# Altium PCB AMS Board layout.PcbDoc
Units mm, origin at the board's own origin, x right, y up, seen from the top; angles counter-clockwise.
Board outline 13.59 x 6.35 mm, 2 copper layers (Top Layer, Bottom Layer), stack 0.121 mm thick; 11 components, 6 nets, 26 pads, 33 vias.
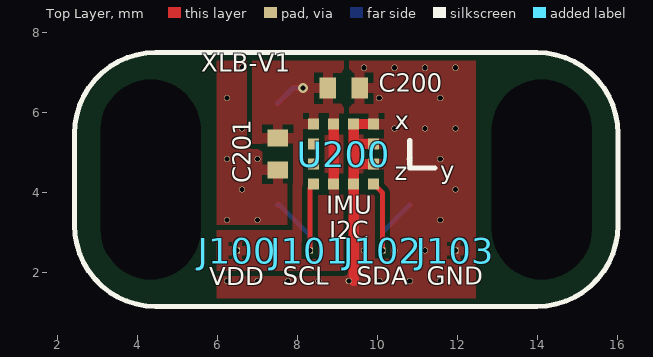
[diagram p0: Top Layer view]
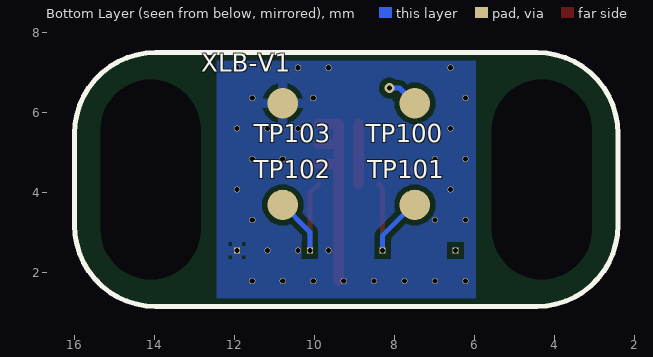
[diagram p1: Bottom Layer view, seen from below]

## Layer stack, top to bottom
Top Solder: solder mask 0.0254, SM-001, Dk 4
Top Layer: signal copper 0.035
Polyimide 4 Core: core 0.0508, Core-001, Dk 4.1
Bottom Layer: signal copper 0.035
Bottom Solder: solder mask 0.0254, SM-001, Dk 4

## Board outline
2.413,3.175 2.413,5.461 cw(c4.445,5.461) 4.445,7.493 13.97,7.493 cw(c13.97,5.461) 16.002,5.461 16.002,3.175 cw(c13.97,3.175) 13.97,1.143 4.445,1.143 cw(c4.445,3.175)

## Design rules (kind name [scope] priority, off if disabled: settings)
AcuteAngle [All] p1: minimum=6.00000000000000E+0001 checktracksonly=FALSE
AssemblyTestPointUsage [All] p1 off:
AssemblyTestpoint [All] p1 off: testpointundercomponent=TRUE minsize=1.016 maxsize=2.54 preferedsize=1.524 minholesize=0 maxholesize=1.016 preferedholesize=0.813 testpointgrid=0.025 usegrid=TRUE gridtolerance=0 allowsidetop=TRUE allowsidebottom=TRUE
BoardOutlineClearance [Not(OnLayer('Top Overlay')OR OnLayer('Bottom Overlay') or (IsPad and not InAnyNet))] p1: gap=0.06 ignorepadtopadclearanceinfootprint=FALSE except(0: Arc-SplitContinuation Track-SplitContinuation SMDPad-SplitContinuation THPad-SplitContinuation Via-SplitContinuation Fill-SplitContinuation Poly-SplitContinuation Region-SplitContinuation Text-SplitContinuation; 0.2: Poly-OutlineEdge Poly-CavityEdge Poly-CutoutEdge) // GSS_Standard
Clearance Clearance_GSS_STD_3mil_IMU [WithinRoom('U_IMU_MIS2DHTR')] p1: gap=0.127 ignorepadtopadclearanceinfootprint=TRUE // 18u (1/2oz) Cu
Clearance Clearance_GSS_STD_3mil [not WithinRoom('U_IMU_MIS2DHTR')] p2: gap=0.127 ignorepadtopadclearanceinfootprint=TRUE except(0.178: Arc-SMDPad Track-SMDPad)
ComponentClearance [All] p1: gap=0.2 collisioncheckmode=3 verticalgap=0.254 showdistances=FALSE
FabricationTestPointUsage [All] p1 off: valid=0 allowmultiple=FALSE
FabricationTestpoint [All] p1 off: side=3 testpointundercomponent=TRUE minsize=1.016 maxsize=2.54 preferedsize=1.524 minholesize=0 maxholesize=1.016 preferedholesize=0.813 testpointgrid=0.025 allowsidetop=TRUE allowsidebottom=TRUE usegrid=TRUE gridtolerance=0
FanoutControl Fanout_Default [All] p1: bgadir=Out bgaviamode=Centered fanoutstyle=Auto fanoutdirection=Alternating viagrid=0.025 // Fanout_Default (Default Rule)
HoleSize [All] p1: absolutevalues=TRUE maxlimit=6 minlimit=0.127 maxpercent=80.000 minpercent=20.000
HoleToHoleClearance [IsVia vs IsVia] p1: gap=0.254 allowstackedmicrovias=FALSE
MaxMinImpedance [InNet('NetC59_1')] p1: minimum=50.00 maximum=50.00
MinimumSolderMaskSliver MinimumSolderMaskSliver_GSS_PERF [All] p1: minsoldermaskwidth=0.018
NetAntennae [not (WithinRoom('ENPANEL') or WithinRoom('POWERIN') or WithinRoom('THERM'))] p1: netantennaetolerance=0
PermittedLayers [All] p1: toplayerpermitted=TRUE bottomlayerpermitted=TRUE
PlaneClearance [IsPolygon] p1 off: clearance=0.06
PlaneConnect [All] p1 off: planeconnectstyle=Direct reliefexpansion=0.508 reliefentries=4 reliefconductorwidth=0.254 reliefairgap=0.254
PolygonConnect [All] p1: thpad.connectstyle=Relief thpad.reliefconductorwidth=0.254 thpad.reliefentries=4 thpad.polygonreliefangle="90 Angle" thpad.airgapwidth=0.127 smdpad.connectstyle=Relief smdpad.reliefconductorwidth=0.254 smdpad.reliefentries=4 smdpad.polygonreliefangle="90 Angle" smdpad.airgapwidth=0.127 via.connectstyle=Direct via.reliefconductorwidth=0.254 via.reliefentries=4 via.polygonreliefangle="90 Angle" via.airgapwidth=0.127
RoomDefinition U_XLBoard [InComponentClass('U_XLBoard')] p1: confinementstyle=ConfineIn formatcopy=TRUE lockcomponents=FALSE outline 5.969,7.493 12.446,7.493 12.446,1.143 5.969,1.143
RoomDefinition U_IMU_MIS2DHTR [InComponentClass('U_IMU_MIS2DHTR')] p2: confinementstyle=ConfineIn formatcopy=TRUE lockcomponents=FALSE outline 6.858,3.048 11.43,3.048 11.43,7.239 6.858,7.239
RoutingCorners [All] p1 off: cornerstyle=45-Degree minsetback=2.54 maxsetback=2.54
RoutingVias [All] p1: holewidth=0.711 width=1.27 viastyle="Through Hole" minholewidth=0.127 minwidth=0.254 maxholewidth=0.711 maxwidth=1.27
SMDEntry [All] p1: side=TRUE corner=TRUE anyangle=TRUE
SMDNeckDown [All] p1 off: percent=50.000
SilkToSilkClearance [All] p1 off: silktosilkclearance=0.127
SilkToSolderMaskClearance SilkscreenOverComponentPads [All] p1: minsilkscreentomaskgap=0.127 clearancetoexposedcopper=FALSE
SolderMaskExpansion SolderMaskExpansion_Via [IsVia] p1: expansion=0.102 istentingtop=TRUE
UnConnectedPin [All] p1 off:
UnRoutedNet [All] p1: checkbadconnections=TRUE
Width Width_GSS_STD_10mil [All] p1: maxlimit=0.508 minlimit=0.076 preferedwidth=0.254 minimp=50.000000 maximp=50.000000 favimp=50.000000 // 18u (1/2oz) Cu
10 further rules are at their usual default settings.

## Classes and differential pairs
component class U_XLBoard: J100 J101 J102 J103 TP100 TP101 TP102 TP103
component class U_IMU_MIS2DHTR: C200 C201 U200

## Components (designator, comment, footprint, x,y, rotation, side; value= is the part's Value field where it differs from the comment)
C200 "ZRB15XR61A106ME01D" CAP0402_REDUCED 9.144,6.604 r180 top value=10uF
C201 "GCM155R71C104KA55" CAP0402_REDUCED 7.493,4.953 r90 top value=0.1uF
J100 "THPAD_20m" FEEDHOLE_20mil#1 7.696,2.54 r90 top value="FT pad"
J101 "THPAD_20m" FEEDHOLE_20mil#2 8.653,2.54 r90 top value="FT pad"
J102 "THPAD_20m" FEEDHOLE_20mil#3 9.635,2.54 r90 top value="FT pad"
J103 "THPAD_20m" FEEDHOLE_20mil#4 10.592,2.54 r90 top value="FT pad"
TP100 "Test Point" testpad_0.9mm 7.493,6.223 r90 bottom value="Test point"
TP101 "Test Point" testpad_0.9mm 7.493,3.683 r90 bottom value="Test point"
TP102 "Test Point" testpad_0.9mm 10.795,3.683 r90 bottom value="Test point"
TP103 "Test Point" testpad_0.9mm 10.795,6.223 r90 bottom value="Test point"
U200 "MIS2DHTR" LGA-12-P4X4-REMOVE4LEADS_200X200X100 9.144,4.953 r90 top

## Footprints (in the part's own frame and the unit in brackets; to place one, negate y for a bottom-side part, rotate by r counter-clockwise, add the part's x,y. Pads: shape width x height; smd on the part's side, far side on the other; paste and mask are expansions set on the pad)
CAP0402_REDUCED [mm] "Chip Capacitor, Body 1.0x0.5mm, Height 0.6mm, IPC High Density"
  rect 0.42x0.52 smd: 1(-0.4,0) 2(0.4,0)
  body extent -0.55,-0.3 0.55,0.3, height 0.6
FEEDHOLE_20mil#1 [mil] "Feedthrough hole 20mil"
  rect 6x6 hole 5: 1(0,48)
FEEDHOLE_20mil#2 [mil] "Feedthrough hole 20mil"
  rect 6x6 hole 5: 1(0,14)
FEEDHOLE_20mil#3 [mil] "Feedthrough hole 20mil"
  rect 6x6 hole 5: 1(0,-19)
FEEDHOLE_20mil#4 [mil] "Feedthrough hole 20mil"
  rect 6x6 hole 5: 1(0,-53)
LGA-12-P4X4-REMOVE4LEADS_200X200X100 [mm] "LGA, 12-Leads, Body 2.00x2.00mmx1.00mm, Pitch 0.50mm"
  rect 0.275x0.275 smd: 1(-0.75,0.75) 2(-0.75,0.25) 3(-0.75,-0.25) 4(-0.75,-0.75) 5(-0.25,-0.75) 6(0.25,-0.75) 7(0.75,-0.75) 8(0.75,-0.25) 9(0.75,0.25) 10(0.75,0.75) 11(0.25,0.75) 12(-0.25,0.75)
  body extent -0.92,-0.92 0.92,0.92, height 1
testpad_0.9mm [mil]
  round 30 smd: 1(0,0)

## Part data
C200: "Capacitor, 10uf, X5R, 10V, 20%, 0402, Implant-grade", Manufacturer=Murata, Medical Grade MFR=TBD, Package Description=0402, Rating=10V, Category=Capacitor, Length (mm)="1.00 ±0.22", Manufacturer PN=ZRB15XR61A106ME01D, Medical Grade MFR PN=TBD, PCB Footprint=cap0402_reduced, Supplier 1="Arrow Electronics", Supplier Part Number 1=ZRB15XR61A106ME01D, Thickness (mm)="0.65 ±0.2", Width (mm)="0.50 ±0.2"
C201: "Capacitor, 0.1uF, X7R, 16V, 10%, 0402, Implant-grade", Manufacturer=Murata, Medical Grade MFR PN=GCH155R71C104KE01, Package Description=0402, Rating=16V, Supplier Part Number 1=GCM155R71C104KA55J, Category=Capacitor, Length (mm)="1.00 ±0.05", Manufacturer PN=GCM155R71C104KA55, Medical Grade MFR=Murata, PCB Footprint=cap0402_reduced, Supplier 1="Arrow Electronics", Thickness (mm)="0.50 ±0.05", Width (mm)="0.50 ±0.05"
J100 J101 J102 J103: library part HOLE_20m, "FT pad, Thru-hole, 20 mil hole", Manufacturer=N/A, Package Description="FT pad", Category="FT pad", Length (mm)=TBD, Manufacturer PN=N/A, Medical Grade MFR=N/A, Medical Grade MFR PN=N/A, PCB Footprint=TBD, Rating=N/A, Thickness (mm)=N/A, Width (mm)=TBD
TP100 TP101 TP102 TP103: "Test pad, 0.90mm circular pad", Manufacturer=N/A, Category="Test point", Length (mm)=0.90, Manufacturer PN=N/A, Medical Grade MFR=N/A, Medical Grade MFR PN=N/A, PCB Footprint=testpad_0p90mm, Rating=N/A, Thickness (mm)=N/A, Width (mm)=0.90
U200: "Analog Circuit, Accelerometer, LGA-12", Manufacturer=STMicroelectronics, Medical Grade MFR=TBD, Package Description=VFLGA, Rating=3.6V, Supplier Part Number 1=511-MIS2DHTR, Category=Accelerometers, Length (mm)=2, Manufacturer PN=MIS2DHTR, Medical Grade MFR PN=TBD, PCB Footprint=TBD, Supplier 1=Mouser, Thickness (mm)=1, Width (mm)=2

## Free pads (board coordinates)
  round 0 hole 2.5 slot 5 at 90 deg unplated: 19(14.097,4.318) 20(4.318,4.318)

## Via types
v1: diameter 0.152, hole 0.127, Top Layer to Bottom Layer, tented both sides, 32 vias
v2: diameter 0.254, hole 0.127, Top Layer to Bottom Layer, tented both sides, 1 vias

## Nets (pads, with @x,y where several pads share a name; then routed paths per layer and width w, separated by ;. In a path a pad name is that pad's centre, name@x,y a point inside that pad or via, vN(x,y) a via of type N, cw(c..) or ccw(c..) an arc to the next point about the centre after c; other vN are vias at no path point)
GND: C200.1 C201.1 J103.1 TP103.1 U200.3 U200.5 U200.6 U200.7 U200.8 | length 5.4
  Top Layer w0.254: C201.1@7.488,4.558 C201.1 ; 9.394,1.782 U200.3 9.394,4.705 ; U200.5 9.396,4.703 9.394,4.705 ; U200.6 9.89,5.207 9.394,5.207 ; U200.7 U200.8 9.394,5.207 ; 9.394,4.705 9.394,5.207
  other v1: 6.223,1.778 6.985,1.778 7.747,1.778 8.509,1.778 9.271,1.778 10.033,1.778 10.795,1.778 11.557,1.778 9.652,2.54 10.414,2.54 11.176,2.54 6.223,3.302 6.985,3.302 11.557,3.302 6.604,4.064 11.938,4.064 6.223,4.826 6.985,4.826 10.795,4.826 11.557,4.826 6.604,5.588 10.414,5.588 11.176,5.588 11.938,5.588 6.223,6.35 10.033,6.35 11.557,6.35 6.604,7.112 9.652,7.112 10.414,7.112 11.176,7.112 11.938,7.112
INT1: U200.12
INT2: U200.11
SCL: J101.1 TP101.1 U200.1 | length 3.2
  Top Layer w0.127: J101.1 8.297,4.106 U200.1
  Bottom Layer w0.127: TP101.1 7.535,3.683 8.297,2.921 J101.1
SDA: J102.1 TP102.1 U200.4 | length 3.2
  Top Layer w0.127: U200.4 10.118,3.979 J102.1
  Bottom Layer w0.127: J102.1 10.118,3.006 TP102.1
VDD: C200.2 C201.2 J100.1 TP100.1 U200.2 U200.9 U200.10 | length 2.3
  Top Layer w0.254: U200.2 U200.9
  Bottom Layer w0.127: TP100.1 7.874,6.604 v2(8.128,6.604)

## Polygon pours and split planes (outlines as drawn)
GND on Top Layer "NONET_L-01_P-001" (solid, pour order 3): 5.969,1.143 5.969,7.493 12.446,7.493 12.446,1.143
VDD on Top Layer "NONET_L-01_P-001" (solid, pour order 0): 9.144,7.493 9.144,2.032 5.969,2.032 5.969,3.048 7.874,3.048 7.874,5.207 6.858,5.207 6.858,7.493
GND on Bottom Layer "NONET_L-01_P-001" (solid, pour order 4): 5.969,7.493 12.446,7.493 12.446,1.143 5.969,1.143

## Silkscreen, mask and mechanical layers (free items; w line width, h text height)
Top Overlay:
  lines w0.127: 10.795,5.297 10.795,4.609 11.43,4.609 ; 2.413,3.175 ccw(c4.445,3.175) 4.445,1.143 13.97,1.143 ccw(c13.97,3.175) 16.002,3.175 16.002,5.461 ccw(c13.97,5.461) 13.97,7.493 4.445,7.493 ccw(c4.445,5.461) 2.413,5.461 2.413,3.175
  text "XLB-V1" at 5.588,6.858 h0.76
  text "x" at 10.414,5.424 h0.76
  text "z" at 10.415,4.154 h0.76
  text "y" at 11.557,4.17 h0.76
  text "IMU" at 8.704,3.31 h0.76
  text "I2C" at 8.785,2.675 h0.76
  text "VDD" at 5.779,1.524 h0.76
  text "SCL" at 7.621,1.532 h0.76
  text "SDA" at 9.476,1.532 h0.76
  text "GND" at 11.218,1.532 h0.76
Bottom Overlay:
  the board outline again, w0.127
  text "XLB-V1" at 12.827,6.858 h0.76
Drill Guide:
  lines w0.254: 5.969,2.159 12.446,2.159 12.446,2.921 5.969,2.921 5.969,2.159
  text "Interface THT: Feedthrough hole 5mil" at 5.969,7.747 h0.51
Board:
  the board outline again, w0.127